# Altium PCB TramHanSTM8S_V1.PcbDoc
Units mm, origin at the board's own origin, x right, y up, seen from the top; angles counter-clockwise.
Board outline 72.17 x 32.38 mm, 2 copper layers (Top Layer, Bottom Layer); 48 components, 43 nets, 176 pads, 29 vias.
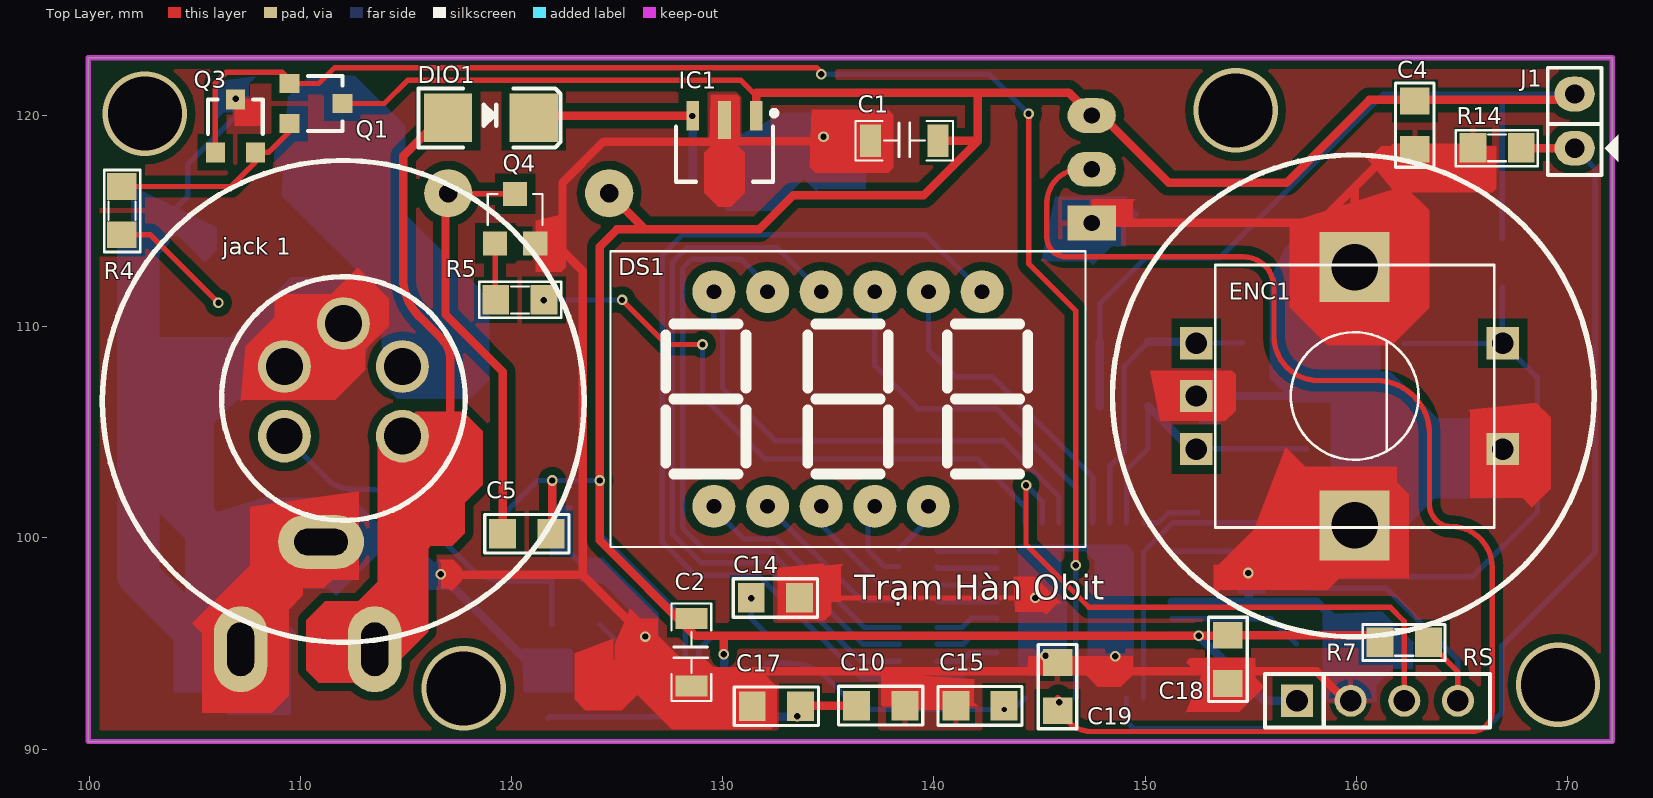
[diagram p0: Top Layer view]
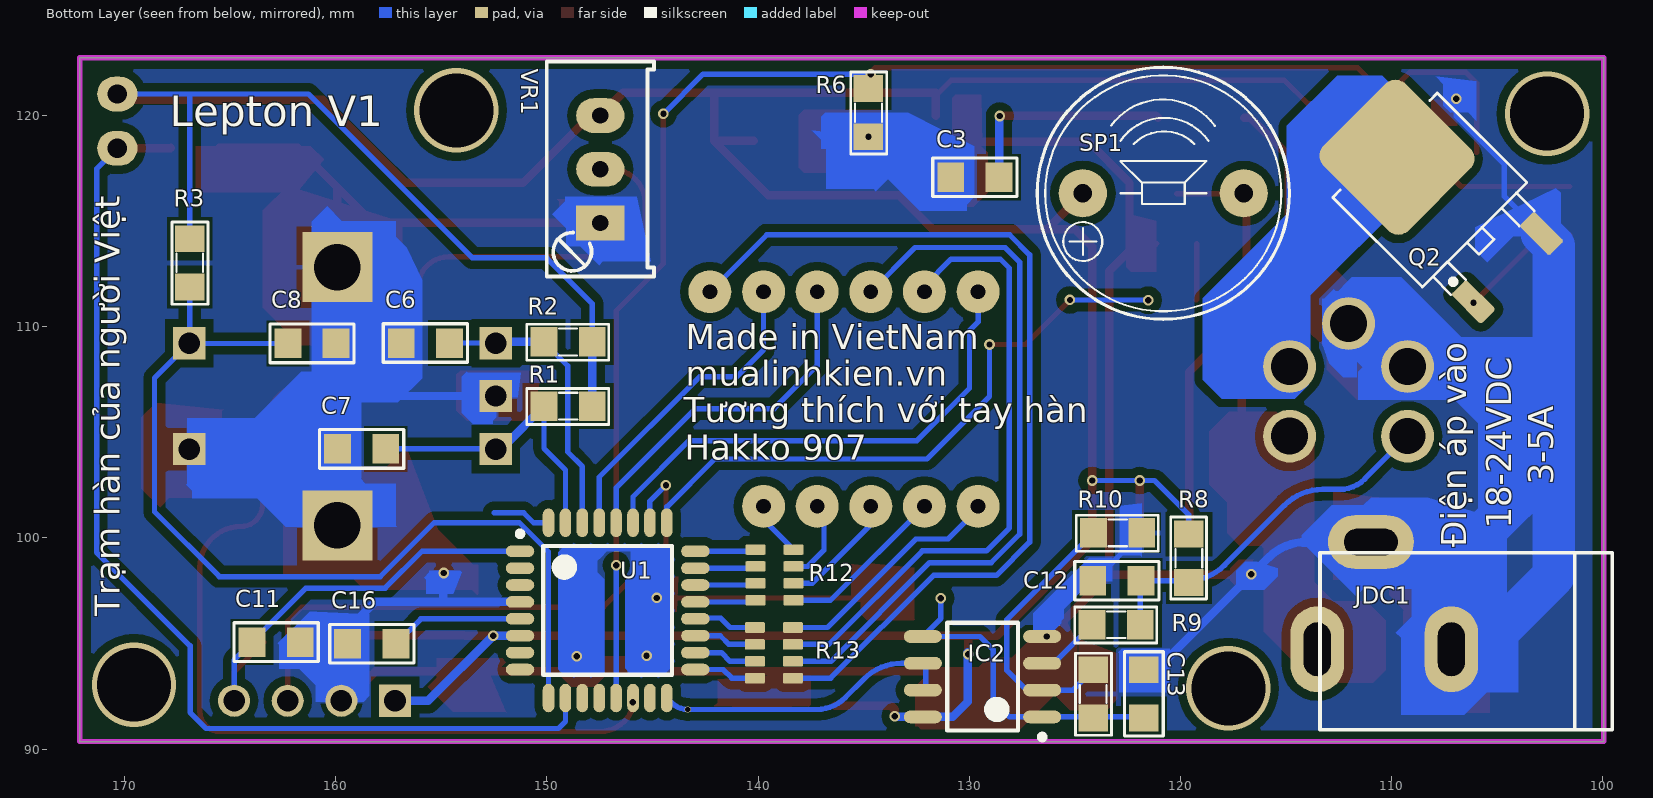
[diagram p1: Bottom Layer view, seen from below]
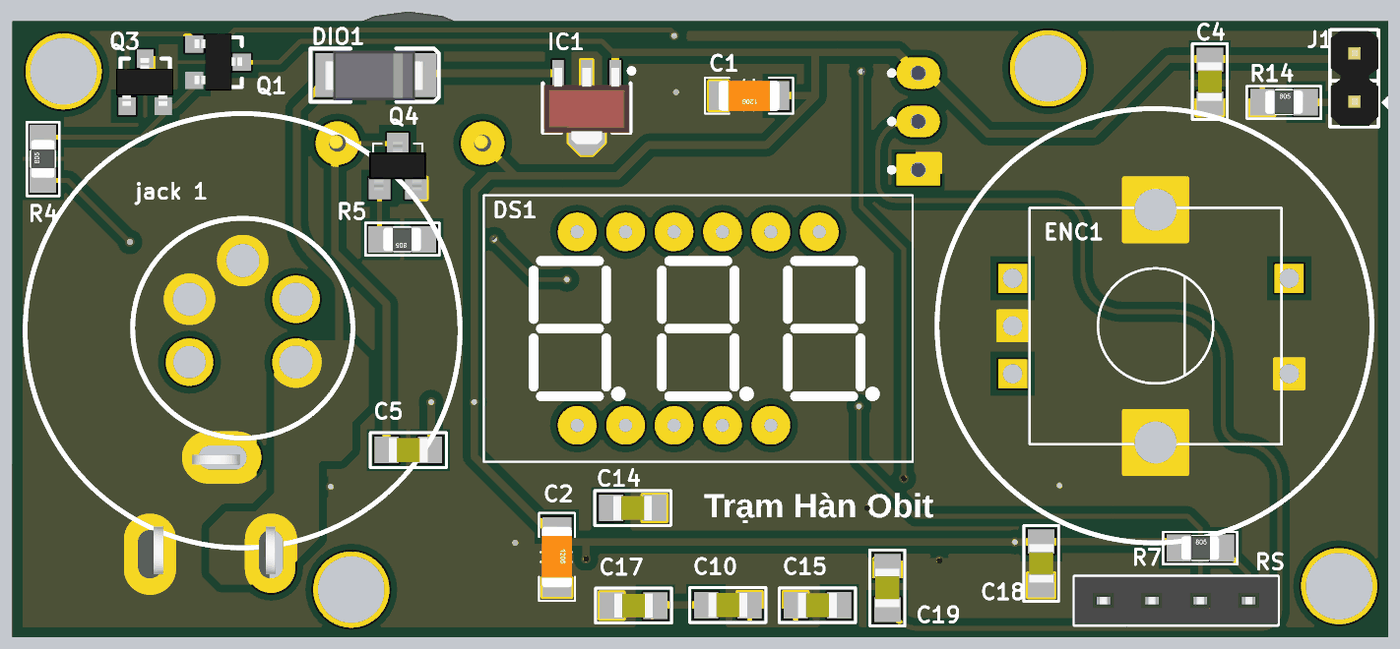
[diagram p2: 3D render of the assembled board from above, using the file's embedded part models]
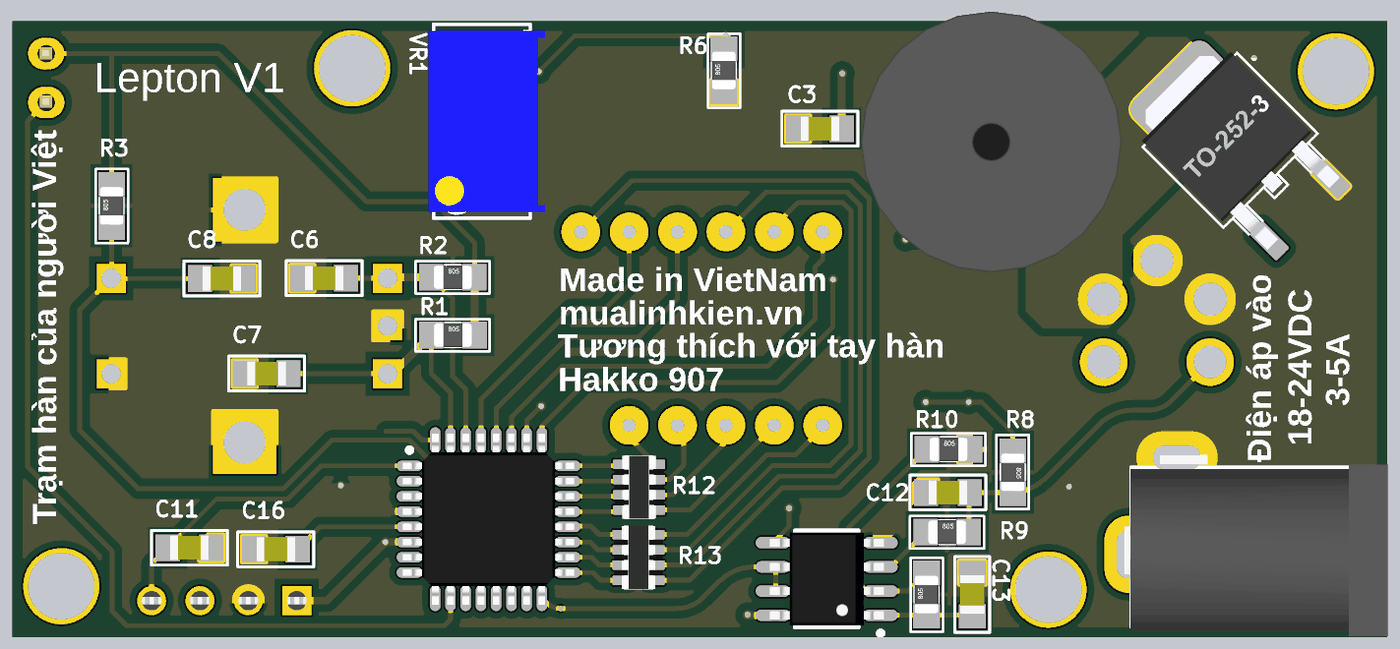
[diagram p3: 3D render of the assembled board from below, using the file's embedded part models]

## Layer stack, top to bottom
Top Solder: solder mask 0.0102, Solder Resist, Dk 3.5
Top Layer: signal copper 0.0356
Dielectric 1: dielectric 0.32, FR-4, Dk 4.8
Bottom Layer: signal copper 0.0356
Bottom Solder: solder mask 0.0102, Solder Resist, Dk 3.5

## Board outline
99.95,90.36 172.12,90.36 172.12,122.74 99.95,122.74

## Design rules (kind name [scope] priority, off if disabled: settings)
Clearance [All] p1: gap=0.22 ignorepadtopadclearanceinfootprint=FALSE
PolygonConnect [All] p1: connectstyle=Relief reliefconductorwidth=0.254 reliefentries=4 polygonreliefangle="90 Angle" airgapwidth=0.254
RoutingVias [All] p1: holewidth=0.6 width=0.65 viastyle="Through Hole" minholewidth=0.6 minwidth=0.65 maxholewidth=0.6 maxwidth=0.65
SolderMaskExpansion [All] p1: expansion=0.102
Width [All] p1: maxlimit=2 minlimit=0.254 preferedwidth=0.4
30 further rules are at their usual default settings.

## Components (designator, comment, footprint, x,y, rotation, side; value= is the part's Value field where it differs from the comment)
C1 "CAP" "C 1206" 138.598,118.812 r180 top value=*uF
C2 "CAP" "C 1206" 128.517,94.585 r270 top value=*uF
C3 "103" SM-0805 129.73,117.08 r180 bottom
C4 "103" SM-0805 162.77,119.55 r90 top
C5 "103" SM-0805 120.72,100.2 r180 top
C6 "103" SM-0805 155.75,109.23 r0 bottom
C7 "103" SM-0805 158.77,104.22 r0 bottom
C8 "103" SM-0805 161.12,109.21 r180 bottom
C10 "103" SM-0805 137.48,92.06 r180 top
C11 "103" SM-0805 162.82,95.07 r0 bottom
C12 "103" SM-0805 123.01,97.97 r180 bottom
C13 "103" SM-0805 121.73,92.613 r90 bottom
C14 "103" SM-0805 132.494,97.158 r0 top
C15 "103" SM-0805 142.18,92.05 r180 top
C16 "103" SM-0805 158.29,94.99 r0 bottom
C17 "103" SM-0805 132.54,92.03 r180 top
C18 "103" SM-0805 153.92,94.25 r270 top
C19 "103" SM-0805 145.851,92.962 r90 top
DIO1 "Diode SMD" DIO-SMD-106 119.02,119.89 r180 top value=1N5007
DS1 "7SEG" "LED 7 SEG 3 DIGIT" 135.93,106.579 r0 top
ENC1 "enc" ENC 159.793,116.881 r270 top
IC1 "LM78xx" SOT89-321 130.08,118.19 r270 top
IC2 "LM358" SO8 129.37,93.43 r0 bottom
J1 "Jumper 2" JP2 170.34,118.455 r90 top value="JP 2"
"jack 1" "907" "jack 907" 115.719,107.868 r180 top locked
JDC1 "Jac DC" DC0 110.345,97.27 r0 bottom
Q1 "2N3904" SOT23-231 110.74,120.57 r270 top value=C1815
Q2 "IRF840" TO252-123 107.131,115.412 r135 bottom
Q3 "2N3906" SOT23-231 106.92,119.51 r0 top value=A1015
Q4 "C1815" "SOT 23" 120.17,115.12 r0 top
R1 "10k" SM-RES-0805 150.136,106.24 r180 bottom value="R1/4W - 1K"
R2 "10k" SM-RES-0805 150.14,109.28 r180 bottom value="R1/4W - 1K"
R3 "10k" SM-RES-0805 166.91,111.884 r90 bottom value="R1/4W - 1K"
R4 "22R" SM-RES-0805 101.55,114.354 r90 top value="R1/4W - 1K"
R5 "1k" SM-RES-0805 121.54,111.27 r180 top value="R1/4W - 1K"
R6 "1k" SM-RES-0805 134.77,118.994 r90 bottom value="R1/4W - 1K"
R7 "1k" SM-RES-0805 161.124,95.06 r0 top value="R1/4W - 1K"
R8 "1k" SM-RES-0805 119.6,100.18 r270 bottom value="R1/4W - 1K"
R9 "0R" SM-RES-0805 124.19,95.89 r180 bottom value="R1/4W - 1K"
R10 "47k" SM-RES-0805 124.116,100.24 r180 bottom value="R1/4W - 1K"
R11 "330k" SM-RES-0805 124.13,91.47 r90 bottom value="R1/4W - 1K"
R12 "RP330" RESCAXS50P160X320X70-8N 139.22,98.25 r180 bottom
R13 "RP330" RESCAXS50P160X320X70-8N 139.25,94.56 r180 bottom
R14 "10k" SM-RES-0805 165.52,118.47 r0 top value="R1/4W - 1K"
RS "JP4" JP4-C1T 157.19,92.29 r0 top (schematic designator C9)
SP1 "Speaker" SPEAKER 120.81,116.32 r180 bottom locked value="Speaker Chip"
U1 "STM8S003K3" TQFP32 147.12,96.57 r180 bottom
VR1 "1K" VR1 147.47,114.92 r90 bottom value="VR 10K"

## Footprints (in the part's own frame and the unit in brackets; to place one, negate y for a bottom-side part, rotate by r counter-clockwise, add the part's x,y. Pads: shape width x height; smd on the part's side, far side on the other; paste and mask are expansions set on the pad)
"C 1206" [mm]
  rect 1x1.524 smd: 1(-1.6,0) 2(1.6,0)
  silkscreen extent -2.31,-0.94 2.31,0.94, body extent -1.6,-0.8 1.6,0.8, height 1
DC0 [mil] "Jac DC input"
  oval 100x160 hole 50 slot 100 at 90 deg: 1(125,100) 2(-125,100)
  oval 160x100 hole 50 slot 100 at 0 deg: 3(25,-100)
  silkscreen extent -425,-80 120,250, body extent -410,-105 134,269, height 434
DIO-SMD-106 [mil]
  rect 90x90.55 smd: 1(80,0) 2(-80,0)
  silkscreen extent -130,-55 135,55, body extent -99,-50 106,52, height 95
ENC [mil] "encoder"
  rect 60x60 hole 40: A(301.57,-290.28) B(499,-290.28) C(400,-290.28) D(301.57,281) E(499,281)
  rect 130.51x130.5 hole 87: GND1(159.84,5)
  rect 130.5x130.5 hole 87: GND2(641,5)
  silkscreen extent 156,-255 645,265
"jack 907" [mm]
  round 2.5 hole 1.75: 1(0.889,3.048) 2(0.889,-0.254) 3(6.477,-0.254) 5(3.683,-2.286)
  round 2.5 hole 1.7: 4(6.477,3.048)
  silkscreen extent -2.09,-4.5 9.45,7.04
JP2 [mil]
  oval 65x75 hole 36: 1(0,0) 2(101,0)
  silkscreen extent -50,-81 150,50, body extent -48,-50 148,48, height 323
JP4-C1T [mm] "4 row, straight, gold plating"
  rect 1.52x1.52 hole 1.02: 1(0,0)
  round 1.52 hole 1.02: 2(2.54,0) 3(5.08,0) 4(7.62,0)
  silkscreen extent -1.52,-1.27 9.14,1.27, body extent -1.52,-1.25 9.14,1.25, height 8.51
"LED 7 SEG 3 DIGIT" [mil] "LD-3361BS"
  round 80 hole 27.56: 1(-250,-200) 2(-150,-200) 3(-50,-200) 4(50,-200) 5(150,-200) 6(250,200) 7(150,200) 8(50,200) 9(-50,200) 10(-150,200) 11(-250,200)
  round 30 on Top Overlay: 12(-165,-135) 12(100,-135) 12(360,-135)
  silkscreen extent -443,-276 443,276
RESCAXS50P160X320X70-8N [mm]
  round 0.254 on Mech15: 0(0,0)
  rrect25% 0.95x0.5 smd: 1(-0.9,1.2) 2(-0.9,0.4) 3(-0.9,-0.4) 4(-0.9,-1.2) 5(0.9,-1.2) 6(0.9,-0.4) 7(0.9,0.4) 8(0.9,1.2)
  Top Layer pour cut-out: -0.4,1.7 0.4,1.7 0.4,-1.7 -0.4,-1.7
  body extent -0.87,-1.68 0.88,1.67, height 0.7
SM-0805 [mil] "Compoment SMD 80x50mil"
  rect 50x55 smd: 1(-45,0) 2(45,0)
  silkscreen extent -78,-36 78,36, body extent -40,-25 40,25, height 24
SM-RES-0805 [mil]
  rect 50x55 smd: 1(0,0) 2(90,0)
  silkscreen extent -32,-34 121,33, body extent 6,-25 84,25, height 31
SO8 [mm] "SOIC, 8-Leads, Body 4.9x3.9mm, Pitch 1.27mm, IPC High Density"
  oval 1.8x0.6 smd: 1(-2.825,1.905) 2(-2.825,0.635) 3(-2.825,-0.635) 4(-2.825,-1.905) 5(2.825,-1.905) 6(2.825,-0.635) 7(2.825,0.635) 8(2.825,1.905)
  silkscreen extent -2.95,-2.55 1.68,2.98, body extent -2.99,-2.45 3,2.45, height 1.6
SOT23-231 [mm]
  rect 0.9x0.95 smd mask+0: 1(0.95,-1.25)
  rect 0.9x0.95 smd: 2(-0.95,-1.25) 3(0,1.25)
  silkscreen extent -1.3,-0.38 1.3,1.25, body extent -1.52,-1.23 1.48,1.27, height 1.06
SOT89-321 [mm] "SOT89, 3-Leads, Body 4.55x2.55mm, Pitch 1.50mm, Lead Span 4.1mm, IPC Medium Density"
  rect 1.4x0.6 smd: 1(-1.8,-1.5) 3(-1.8,1.5)
  rect 1.8x0.6 smd: 2(-1.6,0)
  Top Layer region: -0.7,0.3 -0.05,0.95 1.85,0.95 2.5,0.3 2.5,-0.3 1.85,-0.95 -0.05,-0.95 -0.7,-0.3
  silkscreen extent -2.05,-2.3 1.32,2.48, body extent -2.08,-2.25 1.92,2.25, height 1.5
"SOT 23" [mil]
  rect 45x45 smd: 1(-37.4,-46.26) 2(37.4,-46.26) 3(0,46.26)
  silkscreen extent -51,-12 51,46, body extent -59,-50 59,50, height 43
SPEAKER [mil]
  round 90 hole 35: 1(-150,0) 2(150,0)
  silkscreen extent -235,-235 235,235, body extent -267,-267 273,272, height 299
TO252-123 [mm]
  round 0.5 on Mech15: 0(0,0)
  rrect25% 1x2 smd: 1(-2.285,-3.7) 3(2.285,-3.7)
  rrect25% 5.5x5.7 smd: 2(0,3.7)
  silkscreen extent -3.5,-2.7 3.5,4.5, body extent -3.3,-3.95 3.3,5.76, height 2.31
TQFP32 [mm] "Thin QFP, 32-Leads, Body 9x9mm, Pitch 0.8mm, IPC Low Density"
  oval 1.35x0.55 smd: 1(-4.15,2.8) 2(-4.15,2) 3(-4.15,1.2) 4(-4.15,0.4) 5(-4.15,-0.4) 6(-4.15,-1.2) 7(-4.15,-2) 8(-4.15,-2.8) 17(4.15,-2.8) 18(4.15,-2) 19(4.15,-1.2) 20(4.15,-0.4) 21(4.15,0.4) 22(4.15,1.2) 23(4.15,2) 24(4.15,2.8)
  oval 0.55x1.35 smd: 9(-2.8,-4.15) 10(-2,-4.15) 11(-1.2,-4.15) 12(-0.4,-4.15) 13(0.4,-4.15) 14(1.2,-4.15) 15(2,-4.15) 16(2.8,-4.15) 25(2.8,4.15) 26(2,4.15) 27(1.2,4.15) 28(0.4,4.15) 29(-0.4,4.15) 30(-1.2,4.15) 31(-2,4.15) 32(-2.8,4.15)
  silkscreen extent -4.28,-3.05 3.05,3.75, body extent -4.5,-4.5 4.5,4.5, height 1.4
VR1 [mil] "Variable Resistor"
  rect 65x90 hole 30: 1(0,0)
  oval 65x90 hole 30: 2(100,0) 3(200,0)
  silkscreen extent -100,-100 301,100, body extent -87,-130 288,110, height 455

## Part data
C3 C4 C5 C6 C7 C8 C10 C11 C12 C13 C14 C15 C16 C17 C18 C19: library part CM, "Cap SMD"
DIO1: "Default Diode", Code - JEDEC=DO-214-AB, Published=8-Jun-2000, Publisher="Altium Limited", Revision="July-2002: Re-released for DXP Platform."
DS1: library part "LED 7 SEG 3 DIGIT"
ENC1: library part ENC
IC1: "Positive Voltage Regulator", ComponentLink1Description="Manufacturer Link", ComponentLink1URL=http://www.st.com/, ComponentLink2Description=Datasheet, ComponentLink2URL=http://www.st.com/stonline/products/literature/ds/2146/l78m05c.pdf, DatasheetVersion=Apr-1994, LatestRevisionDate=17-Jul-2002, LatestRevisionNote="Re-released for DXP Platform.", Note="Tab is connected to pin 3 (GND).", PackageDescription="TO, Thru-Hole, Vertical, Heatsink Mounted; 3 In-Line Leads; Pitch 2.54 mm; Pin sequence 1, 3, 2", PackageReference=ISOWATT220AB, PackageVersion=Jul-1998, Published=24-Aug-2001, Publisher="Altium Limited"
IC2: "Low-Power Dual Operational Amplifier"
J1: library part "JP 2"
"jack 1": library part "jack 907"
JDC1: library part DCIN, "Jac DC input"
Q1: library part 2N904, "NPN 600mW, ECB", =C2383
Q2: "MOSFET N - CHANNEL 500V - 0.75 - 8A - TO-220"
Q3: "PNP 600mW, ECB", =A1013
Q4: library part C1815_SMD
R1 R2 R3 R4 R5 R6 R7 R8 R9 R10 R11 R14: library part R1/4W, "Resistor 1/4W"
R12 R13: library part ResPack
RS: "WR-PHD 2.54 mm Angled Socket Header", Manufacturer="W¨¹rth Elektronik eiSos GmbH", partNo=613004143121, ComponentLink1 Description=Manufacturer, ComponentLink1URL=http://www.we-online.com, ComponentLink2 Description=Datasheet, ComponentLink2URL=http://katalog.we-online.de/em/datasheet/6130xx143121.pdf, Created by="Karrer Zheng", Created Date="29 March 2013", NoPins=04
SP1: library part SPK, "Speaker Chip"
U1: "MCU 8BIT  8KB FLASH LQFP-32"
VR1: library part VR1, "Var Resistor"

## Via types
v1: diameter 0.5, hole 0.3, Top Layer to Bottom Layer, tented both sides, 23 vias
v2: diameter 4, hole 3.5, Top Layer to Bottom Layer, 4 vias
v3: diameter 0.3, hole 0.25, Top Layer to Bottom Layer, 1 vias
v4: diameter 0.5, hole 0.3, Top Layer to Bottom Layer, 1 vias

## Nets (pads, with @x,y where several pads share a name; then routed paths per layer and width w, separated by ;. In a path a pad name is that pad's centre, name@x,y a point inside that pad or via, vN(x,y) a via of type N, cw(c..) or ccw(c..) an arc to the next point about the centre after c; other vN are vias at no path point)
24V: "jack 1.1" DIO1.1 JDC1.1 | length 29.3
  Top Layer w0.4: 114.83,104.82 116.012,104.82 ccw(c116.012,105.878) 116.76,105.13 ccw(c115.939,105.951) 117.1,105.951 117.1,108.46 ccw(c115.748,108.46) 116.704,109.416 115.612,110.508 cw(c117.408,112.304) 114.868,112.304 114.868,118.09 116.668,119.89 DIO1.1
  Top Layer w2: JDC1.1 114.83,96.04 114.83,104.82
"907 sensor": "jack 1.4" C12.2 R8.2 R9.2 | length 17.3
  Bottom Layer w0.254: 109.242,104.82 111.276,102.786 ccw(c112.45,103.961) 112.45,102.3 113.268,102.3 cw(c113.268,99.76) 115.064,101.556 117.906,98.714 ccw(c119.702,100.51) 119.702,97.97 C12.2 121.904,97.933 R9.2
calib: J1.1 R14.2 U1.10 | length 50.8
  Top Layer w0.4: R14.2 167.821,118.455 J1.1
  Bottom Layer w0.254: U1.10 149.12,91.31 149.45,90.98 166.13,90.98 166.89,91.74 166.89,94.89 171.32,99.32 171.32,117.475 J1.1
GND: "jack 1.3" "jack 1.5" C1.2 C2.2 C3.1 C4.1 C6.2 C7.2 C8.2 C10.1 C11.1 C12.1 C13.2 C14.2 C15.2 C16.2 C17.2 C18.2 C19.2 ENC1.C ENC1.E ENC1.GND1 ENC1.GND2 IC1.2 IC2.4 JDC1.2 JDC1.3 Q2.3 Q3.3 Q4.2 R6.1 R10.2 R14.1 RS.2 U1.4 VR1.1 | length 253.2
  Top Layer w0.254: Q4.2 121.165,113.9 122.41,113.9 ; C14.2 v1(144.796,97.158) ; C15.2@141.027,92.06 C15.2 ; C19.2@145.224,93.68 145.278,93.734 v1(145.278,94.415) ; v1(148.577,94.392) 148.577,93.754 148.651,93.68
  Top Layer w0.4: v1(116.65,98.28) 116.68,98.25 123.37,98.25 ; 130.23,118.77 129.57,118.77 ; C17.2 131.397,93.663 131.38,93.68 ; C1.2 134.593,118.812 134.561,118.78 129.58,118.78 129.57,118.77 ; C15.2@141.027,92.06 C10.1 138.623,92.747 137.69,93.68 ; VR1.1 158.24,114.92 159.92,116.6 ; v1(148.577,94.392) v1@148.646,94.323 ; C18.2 153.92,93.6 C18.2@153.98,93.66 ; v1(154.88,98.34) 157.66,98.34 ENC1.GND2 ; RS.2@159.73,92.07 158.12,93.68 148.651,93.68 145.224,93.68 137.69,93.68 ; ENC1.GND1 159.92,116.6 ; R14.1 161.79,118.47 159.92,116.6 ; 123.37,98.25 123.37,112.64 122.41,113.6 122.41,113.9 122.41,116.82 124.36,118.77 129.57,118.77 ; 123.37,98.25 126.33,95.29 v1(126.33,95.33) 127.98,93.68 131.38,93.68 ; 131.38,93.68 137.69,93.68
  Bottom Layer w0.254: Q2.3 104.67,116.183 104.67,117.7 106.94,119.97 v1(106.94,120.79) ; R10.2 124.1,97.97 C12.1 124.8,97.97 125.65,97.12 125.65,96.23 IC2.4@126.44,95.44 ; C16.2 159.513,95.07 159.73,95.07 C11.1 ; C7.2 159.92,104.22 166.917,104.22 ENC1.E
  Bottom Layer w0.4: JDC1.3 114.038,99.81 cw(c114.038,97.27) 115.834,99.066 v1@116.635,98.265 ; v1(116.65,98.28) 116.65,98.25 120.73,94.17 ccw(c121.73,95.171) C13.2 ; C3.1 132.856,117.08 v1(134.77,118.994) ; U1.4 154.9,96.97 ; ENC1.C 159.827,106.721 ccw(c159.827,106.853) 159.92,106.76 ; v1(154.88,98.34) 154.9,98.32 154.9,96.97 ; C6.2 C8.2@159.92,109.23 ; RS.2 159.73,95.07 159.73,95.37 158.13,96.97 154.9,96.97 ; ENC1.GND2 159.92,104.22 159.92,106.76 ; ENC1.GND1 C8.2@159.92,109.23 ; C8.2 159.957,109.23 C8.2@159.92,109.23 ; 159.92,106.76 C8.2@159.92,109.23
  Bottom Layer w2: Q2.3 102.32,113.833 102.32,108.9 ; JDC1.2 105.82,94.73 102.32,98.23 102.32,103.58 ; JDC1.3 106.09,99.81 102.32,103.58 ; 112.036,110.154 110.004,108.122 109.242,108.122 103.098,108.122 102.32,108.9 ; 102.32,103.58 102.32,108.9
LEFT: C6.1 ENC1.A R2.1 U1.30 | length 13.8
  Bottom Layer w0.254: U1.30 148.32,103.38 149.01,104.07 149.01,108.15 R2.1 ; ENC1.A 152.429,109.23 C6.1
  Bottom Layer w0.4: R2.1 152.279,109.28 cw(c152.279,109.08) ENC1.A
NetC3_2: C3.2 DIO1.2 IC1.1 | length 10.5
  Top Layer w0.4: DIO1.2 121.152,119.99 IC1.1@128.55,119.99
  Bottom Layer w0.4: v1(128.55,119.98) 128.587,119.943 C3.2
NetC5_2: C5.2 Q4.3 SP1.2 | length 20.5
  Top Layer w0.254: SP1.2 117.025,116.295 Q4.3
  Top Layer w0.4: SP1.2 116.87,116.19 116.87,110.58 119.577,107.873 C5.2
NetC13_1: C13.1 C14.1 IC2.1 IC2.5 R11.1 | length 15.5
  Top Layer w0.254: v1(131.342,97.149) C14.1
  Bottom Layer w0.254: C13.1 121.785,91.525 IC2.1@126.405,91.525 ; IC2.1 128.095,91.525 128.87,92.3 128.87,94.71 129.495,95.335 IC2.5 131.342,96.188 v1(131.342,97.149)
NetC16_1: C16.1 U1.5 | length 6.4
  Bottom Layer w0.254: U1.5 155.967,96.17 C16.1
NetDS1_1: DS1.1 R13.8 | length 11.2
  Bottom Layer w0.254: DS1.1 129.58,101.37 131,99.95 132.53,99.95 136.72,95.76 R13.8
NetDS1_2: DS1.2 R12.5 | length 8
  Bottom Layer w0.254: DS1.2 136.569,97.05 R12.5
NetDS1_3: DS1.3 R12.6 | length 5.7
  Bottom Layer w0.254: DS1.3 134.66,100.63 137.44,97.85 R12.6
NetDS1_4: DS1.4 R12.7 | length 4
  Bottom Layer w0.254: DS1.4 136.876,101.175 136.876,99.424 137.65,98.65 R12.7
NetDS1_5: DS1.5 R12.8 | length 2.6
  Bottom Layer w0.254: R12.8 139.74,100.87 DS1.5
NetDS1_6: DS1.6 R13.5 | length 44.1
  Bottom Layer w0.254: R13.5 136.563,93.36 131.693,98.23 128.71,98.23 127.136,99.804 127.136,113.406 128.08,114.35 139.589,114.35 DS1.6
NetDS1_7: DS1.7 U1.29 | length 15.2
  Bottom Layer w0.254: DS1.7 139.74,108.91 141.02,107.63 142.77,107.63 147.52,102.88 U1.29
NetDS1_8: DS1.8 U1.28 | length 17.1
  Bottom Layer w0.254: DS1.8 137.2,108.16 139.24,106.12 142.97,106.12 146.72,102.37 U1.28
NetDS1_9: DS1.9 R13.6 | length 34.3
  Bottom Layer w0.254: DS1.9 132.565,113.754 128.301,113.754 127.61,113.063 127.61,100.177 128.957,98.83 131.877,98.83 136.547,94.16 R13.6
NetDS1_10: DS1.10 R13.7 | length 29.8
  Bottom Layer w0.254: DS1.10 132.12,111.94 130.86,113.2 128.53,113.2 128.1,112.77 128.1,100.47 129.18,99.39 132.221,99.39 136.651,94.96 R13.7
NetDS1_11: DS1.11 U1.27 | length 24
  Bottom Layer w0.254: DS1.11 129.58,110.235 129.99,109.825 129.99,107.09 132.47,104.61 143.26,104.61 145.92,101.95 U1.27
NetIC2_2: IC2.2 R10.1 R11.2 | length 12.9
  Bottom Layer w0.254: R10.1 128.22,96.136 128.22,93.73 127.285,92.795 IC2.2 ; R11.2 125.091,92.795 IC2.2@126.405,92.795
NetIC2_3: IC2.3 R9.1 | length 3.1
  Bottom Layer w0.254: R9.1 126.015,94.065 IC2.3
"Netjack 1_2": "jack 1.2" Q2.2 | length 12
  Bottom Layer w2: Q2.2 114.83,112.945 114.83,108.122
NetQ1_1: Q1.1 Q3.1 R4.2 | length 9.5
  Top Layer w0.254: R4.2 106.71,116.64 107.87,117.8 Q3.1 ; Q3.1@108.1,118.26 108.48,118.26 Q1.1@109.76,119.54
NetQ2_1: Q2.1 R4.1 | length 5.9
  Top Layer w0.254: R4.1 102.896,114.354 v1(106.12,111.13)
NetQ4_1: Q4.1 R5.2 | length 2.7
  Top Layer w0.254: Q4.1 119.22,111.304 R5.2
NetR12_1: R12.1 U1.24 | length 2.9
  Bottom Layer w0.254: R12.1 140.2,99.37 U1.24
NetR12_2: R12.2 U1.23 | length 2.9
  Bottom Layer w0.254: R12.2 140.2,98.57 U1.23
NetR12_3: R12.3 U1.22 | length 2.9
  Bottom Layer w0.254: R12.3 140.2,97.77 U1.22
NetR12_4: R12.4 U1.21 | length 2.9
  Bottom Layer w0.254: R12.4 140.2,96.97 U1.21
NetR13_1: R13.1 U1.20 | length 3
  Bottom Layer w0.254: R13.1 141.324,95.76 141.774,96.21 142.93,96.21 U1.20
NetR13_2: R13.2 U1.19 | length 3
  Bottom Layer w0.254: R13.2 141.38,94.96 141.79,95.37 U1.19
NetR13_3: R13.3 U1.18 | length 3
  Bottom Layer w0.254: R13.3 141.33,94.16 141.74,94.57 U1.18
NetR13_4: R13.4 U1.17 | length 3
  Bottom Layer w0.254: R13.4 141.24,93.36 141.65,93.77 U1.17
OK: C8.1 ENC1.D R3.1 U1.9 | length 44.5
  Bottom Layer w0.254: U1.9 149.92,93.6 149.92,99.346 151.294,100.72 155.34,100.72 157.89,98.17 165.51,98.17 168.58,101.24 168.58,107.572 ENC1.D ; C8.1 166.919,109.21 ENC1.D ; R3.1 166.91,109.242 ENC1.D
PWM: Q1.2 Q3.2 R6.2 U1.13 | length 72.3
  Top Layer w0.254: Q3.2 105.97,121.52 105.96,121.53 106.48,122.05 109.15,122.05 Q1.2@109.68,121.52 ; Q1.2 Q1.2@109.68,121.52 ; v1(134.67,121.96) 134.67,122.06 134.464,122.266 111.616,122.266 110.87,121.52 Q1.2@109.68,121.52 ; v1(144.48,120.08) 144.48,112.991 146.71,110.761 v1(146.71,98.71)
  Bottom Layer w0.254: v1(134.67,121.96) 142.6,121.96 v1(144.48,120.08) ; v1(146.71,98.71) 146.72,98.7 U1.13
READ_CALIB: C19.1 U1.14 VR1.2 | length 66.1
  Top Layer w0.254: C19.1@145.868,92.443 ccw(c147.477,92.443) 147.477,90.834 165.484,90.834 ccw(c165.484,91.781) 166.431,91.781 166.431,98.607 ccw(c164.496,98.607) 164.496,100.542 cw(c164.496,101.57) 163.468,101.57 163.468,104.916 ccw(c160.928,104.916) 160.928,107.456 158.2,107.456 cw(c158.2,109.557) 156.099,109.557 156.099,111.864 ccw(c154.652,111.864) 154.652,113.311 146.268,113.311 cw(c146.268,114.23) 145.349,114.23 145.349,115.876 cw(c146.933,115.876) 146.933,117.46 VR1.2
  Bottom Layer w0.254: VR1.2@147.336,117.326 VR1.2
  other v4: 145.934,92.224
RIGHT: C7.1 ENC1.B R1.1 U1.31 | length 14.2
  Bottom Layer w0.254: U1.31 149.12,103.22 150.136,104.236 R1.1 ; ENC1.B@152.285,104.222 152.287,104.22 C7.1
  Bottom Layer w0.4: R1.1 151.992,104.384 ccw(c152.42,104.812) ENC1.B@152.285,104.222
RST: C11.2 R7.2 RS.4 U1.1 | length 21
  Top Layer w0.254: R7.2 164.81,93.66 RS.4
  Bottom Layer w0.254: U1.1 155.91,99.37 157.66,97.62 161.413,97.62 C11.2 164.81,94.223 RS.4
SENSOR: C15.1 IC2.6 IC2.7 U1.16 | length 14.4
  Bottom Layer w0.254: IC2.7@132.055,92.795 132.055,94.065 IC2.6 133.193,94.065 cw(c133.193,91.525) 134.989,93.321 135.87,92.44 ccw(c137.222,93.792) 137.222,91.88 v3(143.33,91.88) ccw(c143.33,92.966) 144.098,92.198 U1.16
SPK: R5.1 U1.25 | length 29
  Top Layer w0.254: v1(125.23,111.27) 127.34,109.16 v1(129.04,109.16)
  Bottom Layer w0.254: v1(121.53,111.25) 121.55,111.27 v1(125.23,111.27) ; v1(129.04,109.16) 129.04,106.7 132,103.74 142.05,103.74 144.32,101.47 U1.25
SWIM: RS.3 U1.26 | length 28.3
  Top Layer w0.254: v1(144.36,102.5) 144.36,99.69 147.33,96.72 161.6,96.72 162.27,96.05 RS.3 RS.3@162.27,92.07
  Bottom Layer w0.254: v1(144.36,102.5) 145.12,101.74 U1.26
VCC: C1.1 C2.1 C4.2 C5.1 C10.2 C17.1 C18.1 IC1.3 IC2.8 J1.2 Q1.3 R1.2 R2.2 R3.2 R7.1 R8.1 RS.1 SP1.1 U1.6 VR1.3 | length 209.8
  Top Layer w0.254: Q1.3 113.97,120.57 115.07,121.67 130.86,121.67 131.58,120.95 ; C5.1 121.863,102.663 v1(121.92,102.72) ; R7.1@160.791,95.393 R7.1
  Top Layer w0.4: C5.1 121.92,100.257 v1(121.92,102.72) ; SP1.1 126.33,114.61 ; v1(130.04,94.49) 130.04,95.35 130.06,95.37 ; IC1.3 131.58,120.95 131.58,121.09 142.07,121.09 ; v1(133.52,91.55) 133.52,91.867 C17.1 133.713,92.06 C10.2 ; C1.1 142.038,118.812 142.07,118.78 ; R7.1@160.791,95.393 C18.1 153.897,95.37 v1(152.54,95.37) 130.06,95.37 ; J1.2@169.86,120.74 160.62,120.74 156.691,116.811 151.124,116.811 147.935,120 VR1.3 146.38,121.09 142.07,121.09 ; 126.33,114.61 131.72,114.61 133.33,116.22 139.51,116.22 142.07,118.78 ; 126.33,114.61 124.99,114.61 124.18,113.8 v1(124.18,102.72) 124.18,99.88 128.69,95.37 130.06,95.37 ; 142.07,118.78 142.07,121.09
  Bottom Layer w0.254: R8.1 119.6,101.09 121.23,102.72 v1(121.92,102.72) v1(124.18,102.72) ; R2.2 147.854,111.104 150.01,113.26 153.53,113.26 161.29,121.02 166.91,121.02 ; R3.2 166.91,121.02 ; J1.2 166.91,121.02
  Bottom Layer w0.4: v1(130.04,94.49) 130.04,94.58 130.06,94.6 130.06,92.25 130.785,91.525 IC2.8 133.46,91.525 ccw(c133.46,91.61) v1(133.52,91.55) ; R1.2 147.85,109.276 R2.2 ; U1.6 v1(152.54,95.37) 155.62,92.29 156.97,92.29 RS.1@157.19,92.07
pads on no net: DS1.12 Q2.0 R12.0 R13.0 U1.2 U1.3 U1.7 U1.8 U1.11 U1.12 U1.15 U1.32
copper on no net: | length 2.8
  Bottom Layer w0.254: 149.92,100.72 150.624,100.72 151.098,101.194 152.505,101.194
  other v2: 117.731,92.872 169.55,93.05 102.64,120.09 154.28,120.25

## Polygon pours and split planes (outlines as drawn)
GND on Bottom Layer "Bottom Overlay-No Net" (solid, pour order 8): 99.95,90.36 99.95,122.74 172.068,122.74 172.12,122.688 172.12,90.36
GND on Top Layer "Bottom Overlay-No Net" (solid, pour order 10): 172.12,122.74 172.12,90.36 99.95,90.36 99.95,122.74

## Keep-outs
Keep-Out Layer:
  the board outline again, w0.254

## Other copper
Top Layer:
  region net GND: 137.494,93.619 137.494,92.105 137.594,92.005 137.628,92.039 142.069,92.039 142.077,92.047 141.918,92.206 141.918,93.318
  region net GND: 144.495,94.414 144.512,94.397 149.403,94.397 149.403,93.687 149.487,93.603 148.834,92.95 147.755,92.95 147.169,93.536 144.402,93.536
  region net GND: 152.754,93.694 152.367,93.694 151.935,94.126 152.114,94.305 155.224,94.305 155.224,93.383 155.649,92.958 154.465,91.774 151.964,91.774 151.92,91.73
  region net GND: 160.548,117.926 161.17,118.548 166.618,118.548 166.618,116.534 166.458,116.374 161.819,116.374
  region net GND: 133.624,98.577 133.624,97.171 133.822,96.973 135.582,96.973 135.582,98.639 135.728,98.785
  region net GND: 143.771,98.16 144.772,98.16 146.001,96.931 146.001,96.91 145.834,96.91 145.313,96.389 145.188,96.514 143.854,96.514
  region net GND: 125.615,96.64 126.092,96.163 126.926,96.163 126.926,95.388 127.998,94.316 129.101,94.316 129.951,93.466 132.037,93.466 132.557,92.946 132.557,91.083 132.424,91.083 132.29,90.949 127.581,90.949 124.885,93.645 124.885,94.941
  region net GND: 121.146,115.017 121.146,112.612 122.357,112.612 122.553,112.808 122.553,115.053 122.304,115.302
  region net GND: 156.663,104.295 157.579,103.379 161.903,103.379 161.903,102.646 162.49,102.059 162.49,98.102 159.191,98.102 158.641,97.552 153.547,97.552 153.291,97.296 153.255,97.332 153.255,98.725 153.474,98.725 155.16,100.411
  region net GND: 156.846,114.959 156.846,110.928 158.641,109.133 161.684,109.133 163.442,110.891 163.442,115.51 162.27,116.682
  region net GND: 150.25,107.923 154.098,107.923 154.281,107.74 154.281,106.018 153.804,105.541 150.726,105.541
  region net GND: 147.47,114.92 147.477,114.927 147.477,116.037 149.53,116.037 149.408,115.915 149.408,114.832
  region net GND: 134.207,120.271 137.828,120.271 138.061,120.038 138.061,117.524 137.828,117.291 134.409,117.291 134.113,117.587
  region net GND: 129.429,120.989 130.668,120.989 130.801,120.856 130.801,118.901 130.743,118.901 130.455,118.613 129.392,118.613
  region net GND: 112.772,102.203 112.759,102.19 112.759,98.032 111.507,98.032 111.106,97.631 110.12,97.631 110.12,97.278 109.415,96.573 109.439,96.549 109.439,92.522 108.65,91.733 105.353,91.733 105.353,95.479 104.867,95.965 107.615,98.713 107.615,101.486
  region net GND: 107.186,106.466 107.271,106.551 111.658,106.551 113.082,107.975 113.082,108.931 114.177,110.026 114.177,111.316 112.704,112.789 111.464,111.549 108.783,111.549 108.783,110.447 107.416,109.08
  region net 24V: 114.642,105.152 115.47,105.98 117.722,105.98 118.64,105.062 118.64,102.523 117.775,101.658 117.793,101.64 117.793,100.217 117.199,99.623 116.172,99.623 116.048,99.499 116.048,95.553 113.635,93.14 110.878,93.14 110.284,93.734 110.284,96.112 111.166,96.994 112.733,96.994 113.674,97.935 113.674,104.652 114.12,105.098
  region net GND: 165.31,106.071 165.388,105.993 165.388,101.901 167.874,101.901 168.315,101.46 169.196,102.341 169.196,105.708 168.496,106.408
  region net GND: 106.94,120.79 106.895,120.745 106.895,119.518 108.158,119.518 108.134,119.542 108.134,120.738
  region net GND: 123.002,94.529 123.002,92.416 122.966,92.38 123.499,91.847 125.222,91.847 126.217,92.842 124.814,94.245 124.814,95.222
  region net GND: 132.597,98.599 132.597,96.158 132.588,96.149 132.63,96.107 134.839,96.107 135.139,96.407 135.139,98.383 134.714,98.808
  region net GND: 116.524,98.976 116.668,98.832 116.668,97.624 116.997,97.624 117.136,97.485 117.636,97.985 117.636,98.559 117.23,98.965
Bottom Layer:
  region net GND: 151.244,107.833 153.751,107.833 153.786,107.868 154.021,107.633 154.021,105.934 153.503,105.416 152.563,105.416 152.563,105.554 152.404,105.713 152.404,106.293 151.983,106.714 151.935,106.666 151.375,106.666
  region net GND: 107.105,106.544 111.571,106.544 111.571,107.871 109.632,109.81 107.386,109.81
  region net GND: 120.501,94.76 122.786,94.76 122.949,94.597 122.887,94.535 122.887,92.698 120.633,92.698 120.579,92.752
  region net GND: 122.882,101.527 122.882,99.264 123.162,98.984 123.25,99.072 124.313,99.072 126.96,96.425 126.96,95.284 126.511,95.284 126.415,95.188 125.65,95.953 125.65,96.514 124.219,97.945 123.225,97.945 123.225,98.86 122.905,99.18 121.895,99.18 121.831,99.116 121.831,101.632
  region net GND: 158.399,96.379 158.399,92.519 158.674,92.244 160.935,92.244 160.935,93.017 161.733,93.815 162.67,93.815 162.67,94.944 162.74,95.014 161.237,96.517 160.893,96.517
  region net GND: 154.024,98.367 154.101,98.444 155.567,98.444 155.567,98.367 155.811,98.123 155.708,98.02 155.708,97.351 154.435,97.351 154.422,97.364
  region net GND: 155.911,112.206 155.911,107.57 157.055,106.426 158.787,106.426 158.787,102.823 158.815,102.795 158.592,102.572 157.167,102.572 157.167,100.589 157.111,100.533 162.361,100.533 163.702,101.874 166.802,101.874 166.802,102.237 167.081,102.516 167.025,102.572 167.025,105.672 163.841,105.672 161.635,107.878 161.133,107.878 161.133,114.971 160.407,115.697 159.709,114.999 157.167,114.999 157.167,114.272 156.637,113.742
  region net GND: 145.733,116.156 149.129,116.156 149.129,115.938 149.741,115.326 149.089,114.674 149.089,113.806 148.417,113.806 147.529,112.918 147.352,113.095 145.081,113.095
  region net GND: 133.735,118.821 133.735,117.104 134.418,116.421 134.522,116.525 136.776,116.525 136.776,118.614 137.459,119.297
  region net GND: 132.89,120.129 136.828,120.129 137.012,119.945 137.012,118.421 135.275,118.421 132.339,115.485 130.123,115.485 130.123,115.782 129.756,116.149 129.756,118.548
  region net GND: 115.39,98.572 115.39,98.183 116.035,97.538 117.179,97.538 117.374,97.733 117.346,97.761 117.346,98.455 116.918,98.883 116.373,98.883
  region net GND: 108.271,101.904 110.968,101.904 111.331,101.541 112.841,101.541 114.255,100.127 114.255,99.591 114.026,99.591 111.693,97.258 111.348,97.603 109.055,97.603 109.055,96.265 109.801,95.519 109.552,95.27 109.552,91.618 106.569,91.618 105.498,92.689 104.007,92.689 104.007,95.863 103.797,96.073 104.545,96.821 104.545,100.773
  region net GND: 102.221,116.57 101.989,116.338 101.989,114.282 104.238,114.282 105.46,113.06 106.041,113.641 106.041,114.708
  region net GND: 105.998,121.618 105.998,119.766 106.378,120.146 107.189,120.146 107.207,120.128 107.543,120.464 107.543,121.487 107.915,121.859
  region net GND: 112.739,110.776 112.739,111.478 111.877,112.34 109.531,112.34 106.706,109.515 103.067,109.515 103.067,103.195 105.397,100.865 105.892,101.36 105.892,105.43 107.056,106.594 108.094,106.594 109.786,108.286 110.888,108.286 110.888,109.34 111.973,110.425
  region net "Netjack 1_2": 109.412,120.87 110.431,121.889 112.576,121.889 114.953,119.512 114.953,115.329 118.939,111.343 118.939,107.481 118.046,106.588 114.595,106.588 113.934,107.249 114.006,107.321 114.006,111.324 109.126,116.204 109.126,116.222
  region net GND: 144.021,99.652 143.998,99.629 143.998,93.984 144.479,93.503 145.969,93.503 146.298,93.832 146.298,97.997 146.028,98.267 146.028,99.657
  region net GND: 147.271,93.499 149.179,93.499 149.469,93.789 149.469,99.322 149.119,99.672 147.709,99.672 147.428,99.391 147.428,99.086 147.604,98.91 147.604,98.377 147.275,98.048 147.275,93.706
  region net GND: 147.709,99.672 144.041,99.672 143.998,99.629 144.267,99.36 147.154,99.36 147.428,99.086 147.463,99.121 147.695,99.121
  region net GND: 113.284,109.186 113.284,111.321 113.198,111.321 112.744,111.775 112.645,111.676 112.204,111.676 112.204,110.757 111.308,109.861 111.64,109.529 111.64,107.603 112.289,107.603 112.952,108.266

## Silkscreen, mask and mechanical layers (free items; w line width, h text height)
Top Overlay:
  circle w0.254: c112.03,106.47 r11.405
  circle w0.254: c159.86,106.73 r11.405
  text "Trạm Hàn Obit" at 136.222,96.667 h2
Bottom Overlay:
  text "Lepton V1" at 167.846,119.008 h2.5
  text "Made in VietNam" at 143.425,108.54 h2
  text "mualinhkien.vn" at 143.425,106.794 h2
  text "Tương thích với tay hàn" at 143.511,105.074 h2
  text "Hakko 907" at 143.475,103.309 h2
  text "3-5A" at 101.949,102.512 h2 r270
  text "18-24VDC" at 103.923,100.432 h2 r270
  text "Điện áp vào" at 106.055,99.564 h2 r270
  text "Trạm hàn của người Việt" at 169.813,96.301 h2 r270

## Text inside footprints (layer, text, board x,y; h text height)
ENC1: Mechanical 3 ">NAME" at 168.429,109.221 h1.97 r270; Mechanical 5 ">VALUE" at 150.92,103.216 h1.97 r90